# Altium PCB PCB1.PcbDoc
Units mm, origin at the board's own origin, x right, y up, seen from the top; angles counter-clockwise.
Board outline 50 x 50.04 mm, 2 copper layers (Top Layer, Bottom Layer); 29 components, 35 nets, 108 pads, 6 vias.
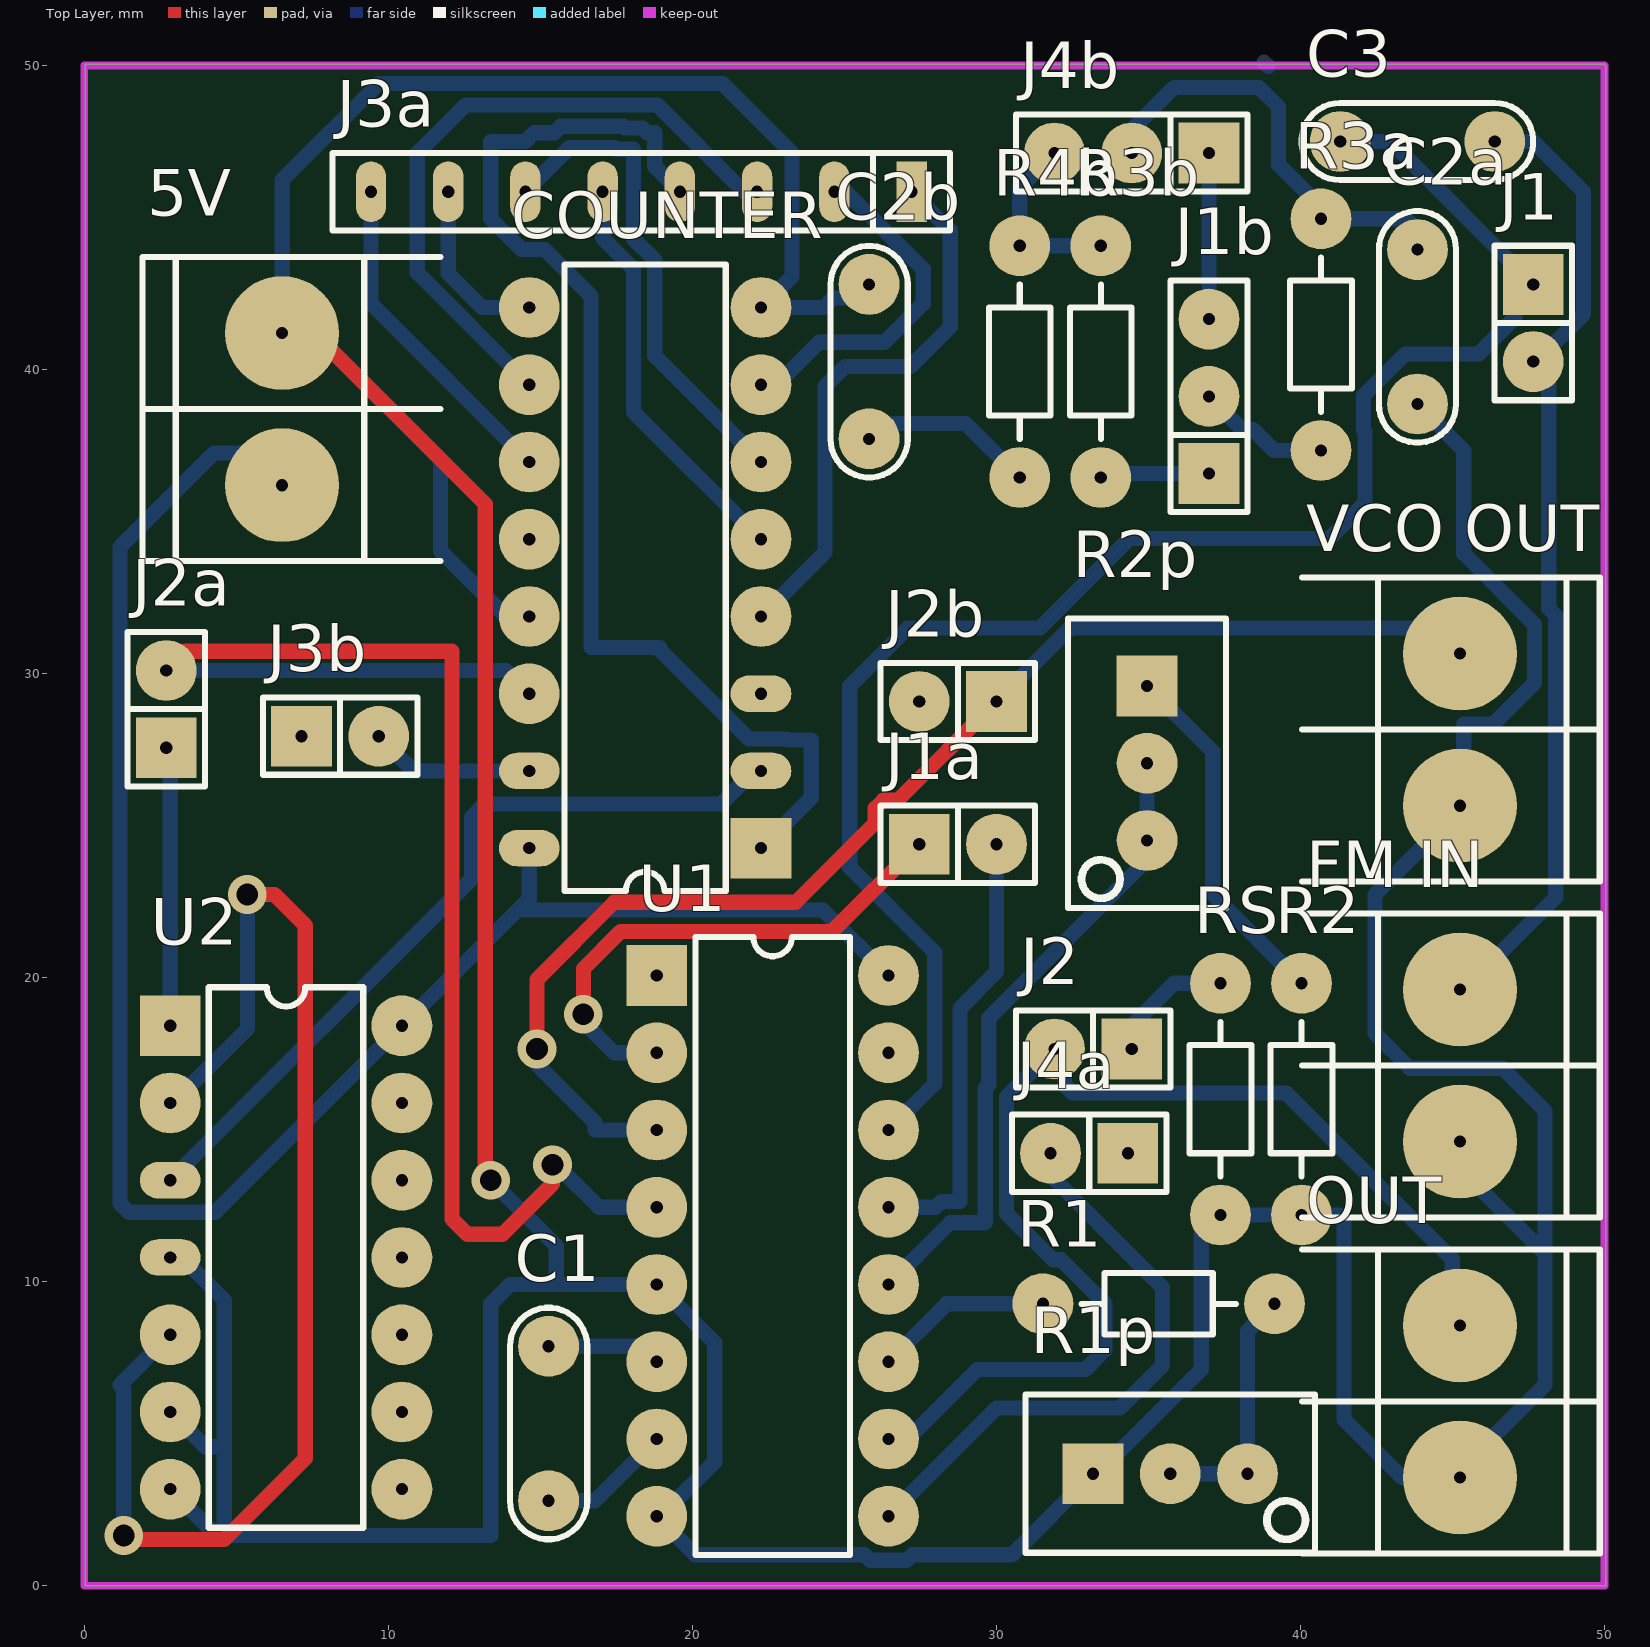
[diagram p0: Top Layer view]
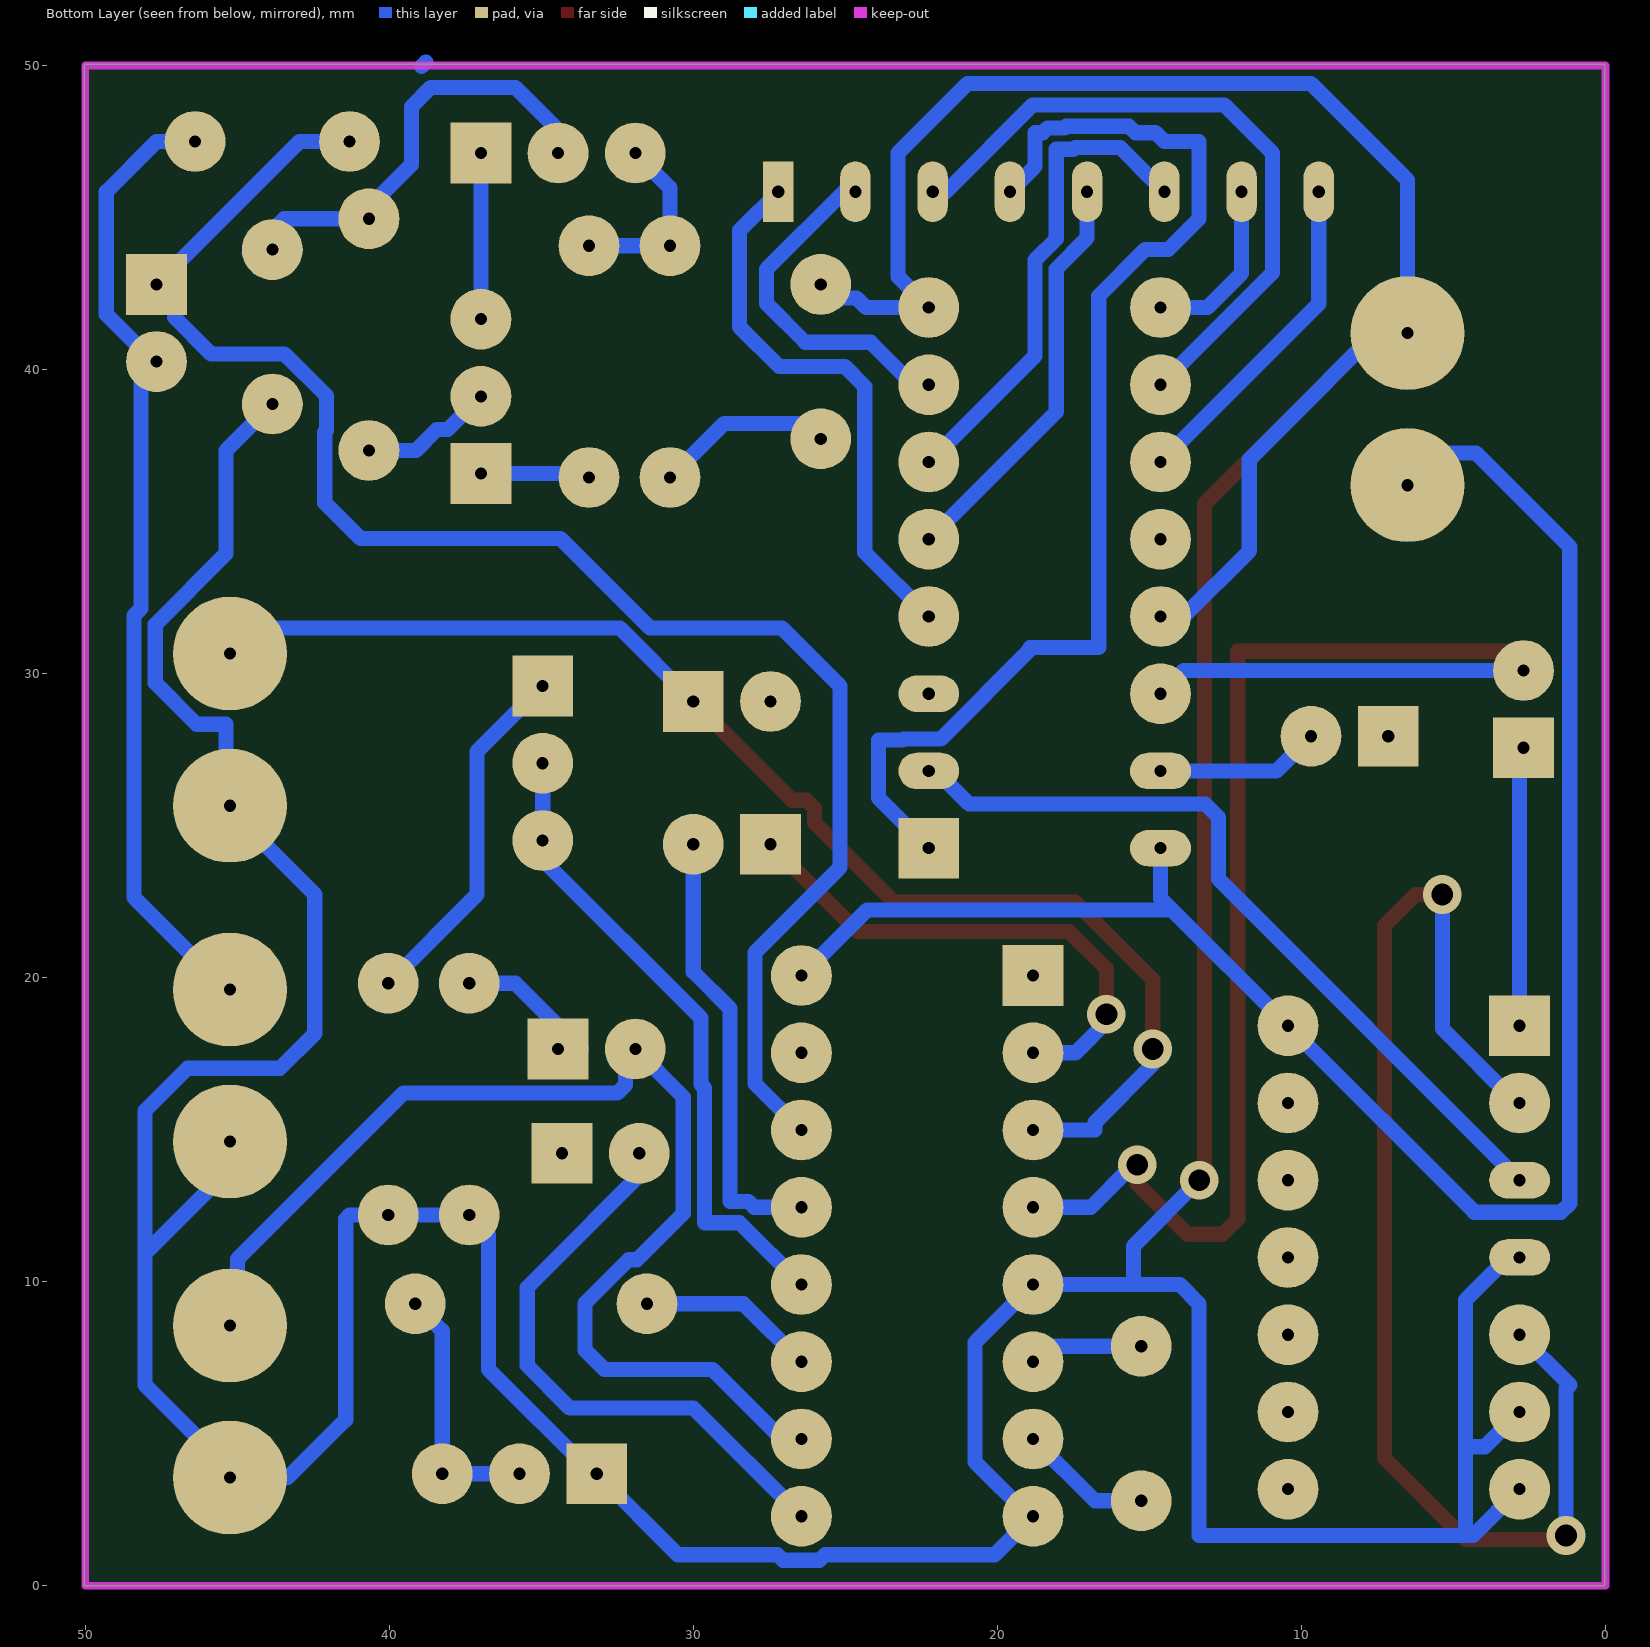
[diagram p1: Bottom Layer view, seen from below]

## Layer stack, top to bottom
Top Solder: solder mask 0.0102, Solder Resist, Dk 3.5
Top Layer: signal copper 0.0356
Dielectric 1: dielectric 0.32, FR-4, Dk 4.8
Bottom Layer: signal copper 0.0356
Bottom Solder: solder mask 0.0102, Solder Resist, Dk 3.5

## Board outline
0.031,0 0.031,50.038 49.993,50.038 50.031,50 50.031,0

## Design rules (kind name [scope] priority, off if disabled: settings)
Clearance [All] p1: gap=0.2 ignorepadtopadclearanceinfootprint=FALSE
PolygonConnect [All] p1: connectstyle=Relief reliefconductorwidth=0.254 reliefentries=4 polygonreliefangle="90 Angle" airgapwidth=0.254
RoutingVias [All] p1: holewidth=0.711 width=1.27 viastyle="Through Hole" minholewidth=0.711 minwidth=1.27 maxholewidth=0.711 maxwidth=1.27
SolderMaskExpansion [All] p1: expansion=0.102
Width [All] p1: maxlimit=0.7 minlimit=0.5 preferedwidth=0.5
30 further rules are at their usual default settings.

## Components (designator, comment, footprint, x,y, rotation, side; value= is the part's Value field where it differs from the comment)
5V "VCC" BORNERA2 6.508,38.695 r0 top
C1 "820pF" CAP200 15.271,5.334 r270 top
C2a "1nF" CAP200 43.846,41.402 r270 top
C2b "470pF" CAP200 25.812,40.259 r90 top
C3 "10nF" CAP200 43.846,47.498 r180 top
COUNTER "SN54HC4017J" J016 18.446,33.147 r90 top
"FM IN" "BORNERA 2" BORNERA2 45.243,17.105 r180 top
J1 "JUMPER" JUMPER2 47.656,41.529 r270 top
J1a "COMP" SIP2 28.733,24.384 r0 top
J1b "FILT" SIP3 36.988,39.116 r90 top
J2 "JUMPER" JUMPER2 33.178,17.653 r180 top
J2a "DIV" SIP2 2.698,28.829 r90 top
J2b "CON2" SIP2 28.733,29.083 r180 top
J3a "N" SIP8 27.209,45.847 r180 top
J3b "CON2" SIP2 8.413,27.94 r0 top
J4a "CON2" SIP2 33.051,14.224 r180 top
J4b "CON3" SIP3 34.448,47.117 r180 top
OUT "BORNERA 2" BORNERA2 45.243,6.056 r180 top
R1 "8.2k" RES300 39.147,9.271 r180 top
R1p "5k" "PRESET V" 35.718,3.683 r0 top
R2 "390k" RES300 40.036,12.192 r90 top
R2p "250k" "PRESET V" 34.956,27.051 r270 top
R3a "100k" RES300 40.671,37.338 r90 top
R3b "100k" RES300 33.432,36.449 r90 top
R4b "10k" RES300 30.765,36.449 r90 top
RS "100k" RES300 37.369,12.192 r90 top
U1 "CD4046B" DIP16 18.827,20.066 r0 top
U2 "IC_DIP14" DIP14 2.825,18.415 r0 top
"VCO OUT" "BORNERA 2" BORNERA2 45.243,28.154 r180 top

## Footprints (in the part's own frame and the unit in brackets; to place one, negate y for a bottom-side part, rotate by r counter-clockwise, add the part's x,y. Pads: shape width x height; smd on the part's side, far side on the other; paste and mask are expansions set on the pad)
BORNERA2 [mm] "Bornera con Tornillos 5mm separación"
  round 3.75 hole 0.4: ""(0,-2.5) ""(0,2.5)
  silkscreen extent -4.6,-5 5.2,5, body extent -3.76,-4.89 3.94,5.61, height 10
CAP200 [mm]
  round 2 hole 0.4: ""(-2.54,0) ""(2.54,0)
  silkscreen extent -3.81,-1.27 3.81,1.27, body extent -2.79,-1.17 2.79,1.12, height 6.24
DIP14 [mm]
  round 2 hole 0.4: ""(0,-15.24) ""(0,-12.7) ""(0,-10.16) ""(0,-2.54) ""(7.62,-15.24) ""(7.62,-12.7) ""(7.62,-10.16) ""(7.62,-7.62) ""(7.62,-5.08) ""(7.62,-2.54) ""(7.62,0)
  oval 2x1.2 hole 0.4: ""(0,-7.62) ""(0,-5.08)
  rect 2x2 hole 0.4: ""(0,0)
  silkscreen extent 1.27,-16.51 6.35,1.27, body extent -0.13,-17.14 7.75,1.9, height 4.19
DIP16 [mm]
  round 2 hole 0.4: ""(0,-17.78) ""(0,-15.24) ""(0,-12.7) ""(0,-10.16) ""(0,-7.62) ""(0,-5.08) ""(0,-2.54) ""(7.62,-17.78) ""(7.62,-15.24) ""(7.62,-12.7) ""(7.62,-10.16) ""(7.62,-7.62) ""(7.62,-5.08) ""(7.62,-2.54) ""(7.62,0)
  rect 2x2 hole 0.4: ""(0,0)
  silkscreen extent 1.27,-19.05 6.35,1.27, body extent -0.08,-18.89 7.79,1.11, height 1.98
J016 [mm] "DIP; 16 Leads; Row Spacing 7.62 mm; Pitch 2.54 mm"
  rect 2x2 hole 0.4: ""(-8.89,-3.81)
  oval 1.2x2 hole 0.4: ""(-8.89,3.81) ""(-6.35,-3.81) ""(-6.35,3.81) ""(-3.81,-3.81)
  round 2 hole 0.4: ""(-3.81,3.81) ""(-1.27,3.81) ""(-1.27,-3.81) ""(1.27,3.81) ""(1.27,-3.81) ""(3.81,-3.81) ""(3.81,3.81) ""(6.35,-3.81) ""(6.35,3.81) ""(8.89,-3.81) ""(8.89,3.81)
  silkscreen extent -10.3,-2.65 10.3,2.65
JUMPER2 [mm]
  rect 2x2 hole 0.4: ""(-1.27,0)
  round 2 hole 0.4: ""(1.27,0)
  silkscreen extent -2.54,-1.27 2.54,1.27, body extent -2.46,-1.27 2.54,1.27, height 9.5
"PRESET V" [mm]
  rect 2x2 hole 0.4: ""(-2.54,0)
  round 2 hole 0.4: ""(0,0) ""(2.54,0)
  silkscreen extent -4.76,-2.6 4.76,2.6, body extent -4.7,-2.42 4.83,2.42, height 11.55
RES300 [mm]
  round 2 hole 0.4: ""(0,0) ""(7.62,0)
  silkscreen extent 1.27,-1.02 6.35,1.02, body extent -0.25,-0.97 7.87,0.97, height 2.01
SIP2 [mm]
  rect 2x2 hole 0.4: ""(-1.27,0)
  round 2 hole 0.4: ""(1.27,0)
  silkscreen extent -2.54,-1.27 2.54,1.27
SIP3 [mm]
  rect 2x2 hole 0.4: ""(-2.54,0)
  round 2 hole 0.4: ""(0,0) ""(2.54,0)
  silkscreen extent -3.81,-1.27 3.81,1.27, body extent -3.81,-1.3 3.81,1.24, height 8.38
SIP8 [mm]
  rect 1x2 hole 0.4: ""(0,0)
  oval 1x2 hole 0.4: ""(2.54,0) ""(5.08,0) ""(7.62,0) ""(10.16,0) ""(12.7,0) ""(15.24,0) ""(17.78,0)
  silkscreen extent -1.27,-1.27 19.05,1.27, body extent -1.27,-1.27 19.05,1.27, height 8.38

## Part data
5V: library part "BORNERA 2"
C1 C2a C2b C3: library part CAP
COUNTER: "Decade Counter / Divider", ComponentLink1Description="Manufacturer Link", ComponentLink1URL=http://www.ti.com/, ComponentLink2Description=Datasheet, ComponentLink2URL=http://www-s.ti.com/sc/ds/sn74hc4017.pdf, DatasheetVersion=Jun-1989, LatestRevisionDate=04-Mar-2005, LatestRevisionNote="Stylized 3D Model Added.", PackageDescription="DIP; 16 Leads; Row Spacing 7.62 mm; Pitch 2.54 mm", PackageReference=J016, PackageVersion=Jun-1999, Published=8-Jun-2000, Publisher="Altium Limited"
J1a J2a: library part CON2
J1b: library part CON3
J3a: library part CON8
R1 R2 R3a R3b R4b RS: library part RES
R1p R2p: library part PRESET
U1: library part IC_DIP16

## Via types
v1: diameter 1.27, hole 0.711, Top Layer to Bottom Layer, 6 vias

## Nets (pads, with @x,y where several pads share a name; then routed paths per layer and width w, separated by ;. In a path a pad name is that pad's centre, name@x,y a point inside that pad or via, vN(x,y) a via of type N, cw(c..) or ccw(c..) an arc to the next point about the centre after c; other vN are vias at no path point)
GND: 5V.@6.508,41.195 "FM IN."@45.243,14.605 "VCO OUT."@45.243,25.654 C2a.@43.846,38.862 C2b.@25.812,42.799 COUNTER.@14.636,31.877 COUNTER.@22.256,42.037 OUT.@45.243,3.556 R1p.@33.178,3.683 R2.@40.036,12.192 RS.@37.369,12.192 U1.@18.827,2.286 U1.@18.827,9.906 U2.@2.825,3.175 U2.@2.825,5.715 U2.@2.825,10.795 | length 221.8
  Top Layer w0.5: 5V.@6.508,42.251 13.186,35.573 13.186,13.515 v1(13.366,13.335)
  Bottom Layer w0.5: U2.@2.825,3.175 4.349,1.651 4.603,1.651 ; U2.@2.825,5.715 3.968,4.572 4.603,4.572 ; U2.@2.825,10.795 3.206,10.795 4.603,9.398 4.603,4.572 ; 5V.@6.508,41.195 5V.@6.508,42.251 ; v1(13.366,13.335) 15.525,11.176 15.525,9.906 ; COUNTER.@14.636,31.877 13.874,31.877 11.715,34.036 11.715,37.044 5V.@6.508,42.251 ; C2b.@25.939,43.434 26.066,43.307 25.106,42.347 24.631,42.347 24.321,42.037 22.256,42.037 23.272,43.053 23.272,47.117 20.986,49.403 9.683,49.403 6.508,46.228 5V.@6.508,42.251 ; C2a.@43.846,38.862 45.37,37.338 45.37,33.942 47.695,31.617 47.695,29.691 46.333,28.329 45.37,28.329 45.37,25.654 42.449,22.733 42.449,18.161 43.592,17.018 46.64,17.018 48.037,15.621 48.037,10.922 ; 45.37,14.605 45.37,13.589 48.037,10.922 ; 4.603,1.651 13.366,1.651 13.366,9.271 14.001,9.906 15.525,9.906 ; 4.603,1.651 4.603,4.572 ; 15.525,9.906 18.827,9.906 20.732,8.001 20.732,4.064 18.954,2.286 18.827,2.286 20.097,1.016 25.666,1.016 25.846,0.836 27.047,0.836 27.227,1.016 30.511,1.016 33.178,3.683 33.305,3.683 36.734,7.112 36.734,11.557 37.369,12.192 40.036,12.192 41.306,12.192 41.433,12.065 41.433,5.461 43.338,3.556 44.989,3.556 48.037,6.604 48.037,10.922
NetC1_1: C1.@15.271,7.874 U1.@18.827,7.366 | length 3.8
  Bottom Layer w0.5: C1.@15.271,7.874 18.319,7.874 U1.@18.827,7.366
NetC1_2: C1.@15.271,2.794 U1.@18.827,4.826 | length 4.4
  Bottom Layer w0.5: C1.@15.271,2.794 16.795,2.794 U1.@18.827,4.826
NetC2a_1: C2a.@43.846,43.942 J4b.@34.448,47.117 R3a.@40.671,44.958 | length 15.1
  Bottom Layer w0.5: J4b.@34.448,47.117 34.448,47.879 35.845,49.276 38.639,49.276 39.274,48.641 39.274,46.736 40.671,45.339 40.671,44.958 43.465,44.958 C2a.@44.608,43.815
NetC2b_1: C2b.@25.812,37.719 R4b.@30.765,36.449 | length 5.4
  Bottom Layer w0.5: C2b.@26.066,38.227 28.987,38.227 R4b.@30.765,36.449
NetC3_1: "FM IN."@45.243,19.605 C3.@46.386,47.498 J1.@47.656,40.259 | length 32.2
  Bottom Layer w0.5: 45.29,19.605 45.37,19.605 48.395,22.63 48.395,31.907 48.164,32.138 48.164,39.751 47.656,40.259 47.752,40.259 49.307,41.814 49.307,45.847 47.656,47.498 C3.@46.386,47.498
NetC3_2: C3.@41.306,47.498 J1.@47.656,42.799 U1.@26.447,14.986 | length 53.7
  Bottom Layer w0.5: U1.@26.447,14.986 27.971,16.51 27.971,20.828 25.177,23.622 25.177,29.591 27.082,31.496 31.426,31.496 34.372,34.442 40.95,34.442 42.121,35.613 42.121,37.939 42.068,37.992 42.068,39.135 43.446,40.513 45.859,40.513 47.055,41.709 ; C3.@41.306,47.498 42.957,47.498 J1.@47.656,42.799
NetCOUNTER_1: COUNTER.@22.256,24.257 J3a.@19.589,45.847 | length 39.2
  Bottom Layer w0.5: J3a.@19.589,45.847 18.765,46.671 18.765,47.788 18.511,47.788 18.355,47.944 17.785,47.944 17.732,47.997 15.669,47.997 15.46,47.788 14.799,47.788 14.509,47.498 13.366,47.498 13.366,44.958 14.382,43.942 15.144,43.942 16.668,42.418 16.668,30.861 18.923,30.861 18.923,30.785 21.861,27.847 23.091,27.847 23.125,27.813 23.907,27.813 23.907,25.908 COUNTER.@22.256,24.257
NetCOUNTER_2: COUNTER.@22.256,26.797 U2.@2.825,13.335 | length 26.1
  Bottom Layer w0.5: U2.@2.825,13.335 12.731,23.241 12.731,25.273 13.165,25.707 20.938,25.707 COUNTER.@22.142,26.911
NetCOUNTER_4: COUNTER.@22.256,31.877 J3a.@27.209,45.847 | length 18.3
  Bottom Layer w0.5: COUNTER.@22.256,31.877 24.362,33.983 24.362,39.444 25.015,40.098 27.174,40.098 28.479,41.402 28.479,44.577 J3a.@27.209,45.847
NetCOUNTER_5: COUNTER.@22.256,34.417 J3a.@17.049,45.847 | length 13.6
  Bottom Layer w0.5: J3a.@17.049,45.847 17.049,44.323 18.065,43.307 18.065,38.608 COUNTER.@22.256,34.417
NetCOUNTER_6: COUNTER.@22.256,36.957 J3a.@14.509,45.847 | length 15.7
  Bottom Layer w0.5: J3a.@14.877,46.215 15.959,47.297 17.442,47.297 17.495,47.244 18.065,47.244 18.065,44.297 18.765,43.597 18.765,40.448 COUNTER.@22.256,36.957
NetCOUNTER_7: COUNTER.@22.256,39.497 J3a.@24.669,45.847 | length 11.6
  Bottom Layer w0.5: COUNTER.@22.256,39.497 22.771,39.497 24.168,40.894 26.32,40.894 27.59,42.164 27.59,43.307 25.05,45.847 J3a.@24.669,45.847
NetCOUNTER_9: COUNTER.@14.636,42.037 J3a.@11.969,45.847 | length 5.8
  Bottom Layer w0.5: J3a.@11.969,45.847 11.969,43.154 13.086,42.037 COUNTER.@14.636,42.037
NetCOUNTER_10: COUNTER.@14.636,39.497 J3a.@22.129,45.847 | length 22.2
  Bottom Layer w0.5: COUNTER.@14.636,39.497 10.953,43.18 10.953,47.117 12.533,48.697 18.846,48.697 21.695,45.847 J3a.@22.129,45.847
NetCOUNTER_11: COUNTER.@14.636,36.957 J3a.@9.429,45.847 | length 11
  Bottom Layer w0.5: J3a.@9.429,45.847 9.429,42.164 COUNTER.@14.636,36.957
NetCOUNTER_14: COUNTER.@14.636,29.337 J2a.@2.698,30.099 U1.@18.827,12.446 | length 49.1
  Top Layer w0.5: J2a.@2.698,30.099 3.333,30.734 12.096,30.734 12.096,12.065 12.604,11.557 13.747,11.557 15.398,13.208 v1(15.398,13.843)
  Bottom Layer w0.5: J2a.@2.698,30.099 13.874,30.099 COUNTER.@14.636,29.337 ; v1@15.652,13.716 16.922,12.446 U1.@18.827,12.446
NetCOUNTER_15: COUNTER.@14.636,26.797 J3b.@9.683,27.94 | length 5.4
  Bottom Layer w0.5: J3b.@9.683,27.94 10.826,26.797 COUNTER.@14.636,26.797
NetJ1a_1: J1a.@27.463,24.384 U1.@18.827,17.526 | length 17.4
  Top Layer w0.5: v1(16.414,18.796) 16.414,20.289 17.64,21.516 24.595,21.516 J1a.@27.463,24.384
  Bottom Layer w0.5: v1(16.414,18.796) 16.287,18.669 17.43,17.526 U1.@18.827,17.526
NetJ1a_2: J1a.@30.003,24.384 U1.@26.447,12.446 | length 14.7
  Bottom Layer w0.5: U1.@26.447,12.446 27.997,12.446 28.189,12.638 28.798,12.638 28.798,18.988 30.003,20.193 J1a.@30.003,24.384
NetJ1b_1: J1b.@36.988,36.576 R3b.@33.432,36.449 | length 3.6
  Bottom Layer w0.5: R3b.@33.432,36.449 33.559,36.576 J1b.@36.988,36.576
NetJ1b_2: J1b.@36.988,39.116 R3a.@40.671,37.338 | length 4.8
  Bottom Layer w0.5: J1b.@36.988,39.116 38.078,38.026 38.438,38.026 39.126,37.338 40.671,37.338 R3a.@40.671,37.688
NetJ1b_3: J1b.@36.988,41.656 J4b.@36.988,47.117 | length 5.4
  Bottom Layer w0.5: J4b.@36.988,47.117 36.988,41.848 J1b.@37.115,41.848
NetJ2_1: J2.@34.448,17.653 RS.@37.369,19.812 | length 4.6
  Bottom Layer w0.5: J2.@33.686,17.653 35.845,19.812 RS.@37.369,19.812
NetJ2_2: J2.@31.908,17.653 OUT.@45.243,8.556 U1.@26.447,4.826 | length 39.2
  Bottom Layer w0.5: U1.@26.447,4.826 27.082,4.826 29.368,7.112 32.924,7.112 33.559,7.747 33.559,9.29 32.127,10.721 31.855,10.721 30.331,12.245 30.331,16.076 31.908,17.653 32.236,17.653 32.236,16.467 32.499,16.203 39.528,16.203 44.989,10.742 OUT.@44.989,8.556
NetJ2a_1: J2a.@2.698,27.559 U2.@2.825,18.415 | length 9.2
  Bottom Layer w0.5: J2a.@2.698,27.559 2.825,27.432 U2.@2.825,18.415
NetJ2b_1: "VCO OUT."@45.243,30.654 J2b.@30.003,29.083 U1.@18.827,14.986 | length 43.7
  Top Layer w0.5: v1(14.89,17.653) 14.89,19.939 17.43,22.479 23.399,22.479 26.013,25.093 26.013,25.57 26.276,25.834 26.754,25.834 J2b.@30.003,29.083
  Bottom Layer w0.5: v1(14.89,17.653) 14.89,17.145 16.795,15.24 16.795,14.986 U1.@18.827,14.986 ; J2b.@30.003,29.083 32.416,31.496 44.528,31.496 45.37,30.654
NetJ4a_2: J4a.@31.781,14.224 U1.@26.447,2.286 | length 19.8
  Bottom Layer w0.5: U1.@26.447,2.286 30.003,5.842 34.067,5.842 35.464,7.239 35.464,9.81 31.146,14.128 J4a.@31.146,14.224
NetJ4b_3: J4b.@31.908,47.117 R3b.@33.432,44.069 R4b.@30.765,44.069 | length 6.2
  Bottom Layer w0.5: J4b.@31.908,47.117 30.765,45.974 30.765,44.069 R3b.@33.432,44.069
NetR1_1: R1.@39.147,9.271 R1p.@35.718,3.683 R1p.@38.258,3.683 | length 8.5
  Bottom Layer w0.5: R1p.@35.718,3.683 38.258,3.683 38.258,8.382 R1.@39.147,9.271
NetR1_2: R1.@31.527,9.271 U1.@26.447,7.366 | length 5.9
  Bottom Layer w0.5: U1.@26.447,7.366 28.352,9.271 R1.@31.527,9.271
NetR2_2: R2.@40.036,19.812 R2p.@34.956,29.591 | length 11.9
  Bottom Layer w0.5: R2p.@34.956,29.591 37.115,27.432 37.115,22.733 R2.@40.036,19.812
NetR2p_2: R2p.@34.956,24.511 R2p.@34.956,27.051 U1.@26.447,9.906 | length 21.3
  Bottom Layer w0.5: U1.@26.447,9.906 28.479,11.938 29.622,11.938 29.635,11.951 29.631,11.955 29.631,16.366 29.749,16.484 29.749,18.669 34.956,23.876 34.956,24.511 R2p.@34.956,27.051
NetU2_2: U2.@2.825,8.255 U2.@2.825,15.875 | length 42.3
  Top Layer w0.5: v1(1.301,1.651) 1.428,1.524 4.603,1.524 7.27,4.191 7.27,21.717 6.254,22.733 v1(5.365,22.733)
  Bottom Layer w0.5: v1(1.301,1.651) 1.301,6.477 1.174,6.604 U2.@2.825,8.255 ; U2.@2.825,15.875 2.921,15.875 5.365,18.319 v1(5.365,22.733)
VCC: 5V.@6.508,36.195 COUNTER.@14.636,24.257 U1.@26.447,20.066 U2.@10.445,18.415 | length 60.8
  Bottom Layer w0.5: 5V.@6.508,37.251 4.262,37.251 1.174,34.163 1.174,12.573 1.462,12.285 4.315,12.285 10.445,18.415 14.255,22.225 ; COUNTER.@14.636,24.257 14.636,22.606 14.255,22.225 ; U1.@26.447,20.066 24.288,22.225 14.255,22.225
pads on no net: COUNTER.@14.636,34.417 COUNTER.@22.256,29.337 J2b.@27.463,29.083 J3b.@7.143,27.94 J4a.@34.321,14.224 U1.@18.827,20.066 U1.@26.447,17.526 U2.@10.445,3.175 U2.@10.445,5.715 U2.@10.445,8.255 U2.@10.445,10.795 U2.@10.445,13.335 U2.@10.445,15.875
copper on no net: | length 0.2
  Bottom Layer w0.5: 38.802,50.103 38.943,49.962

## Keep-outs
Keep-Out Layer:
  lines w0.254: 0,0 50,0 50,50 0,50 0,0